# EAGLE board TOOLKIT_CON_ETIQ (EAGLE 7.6.0)
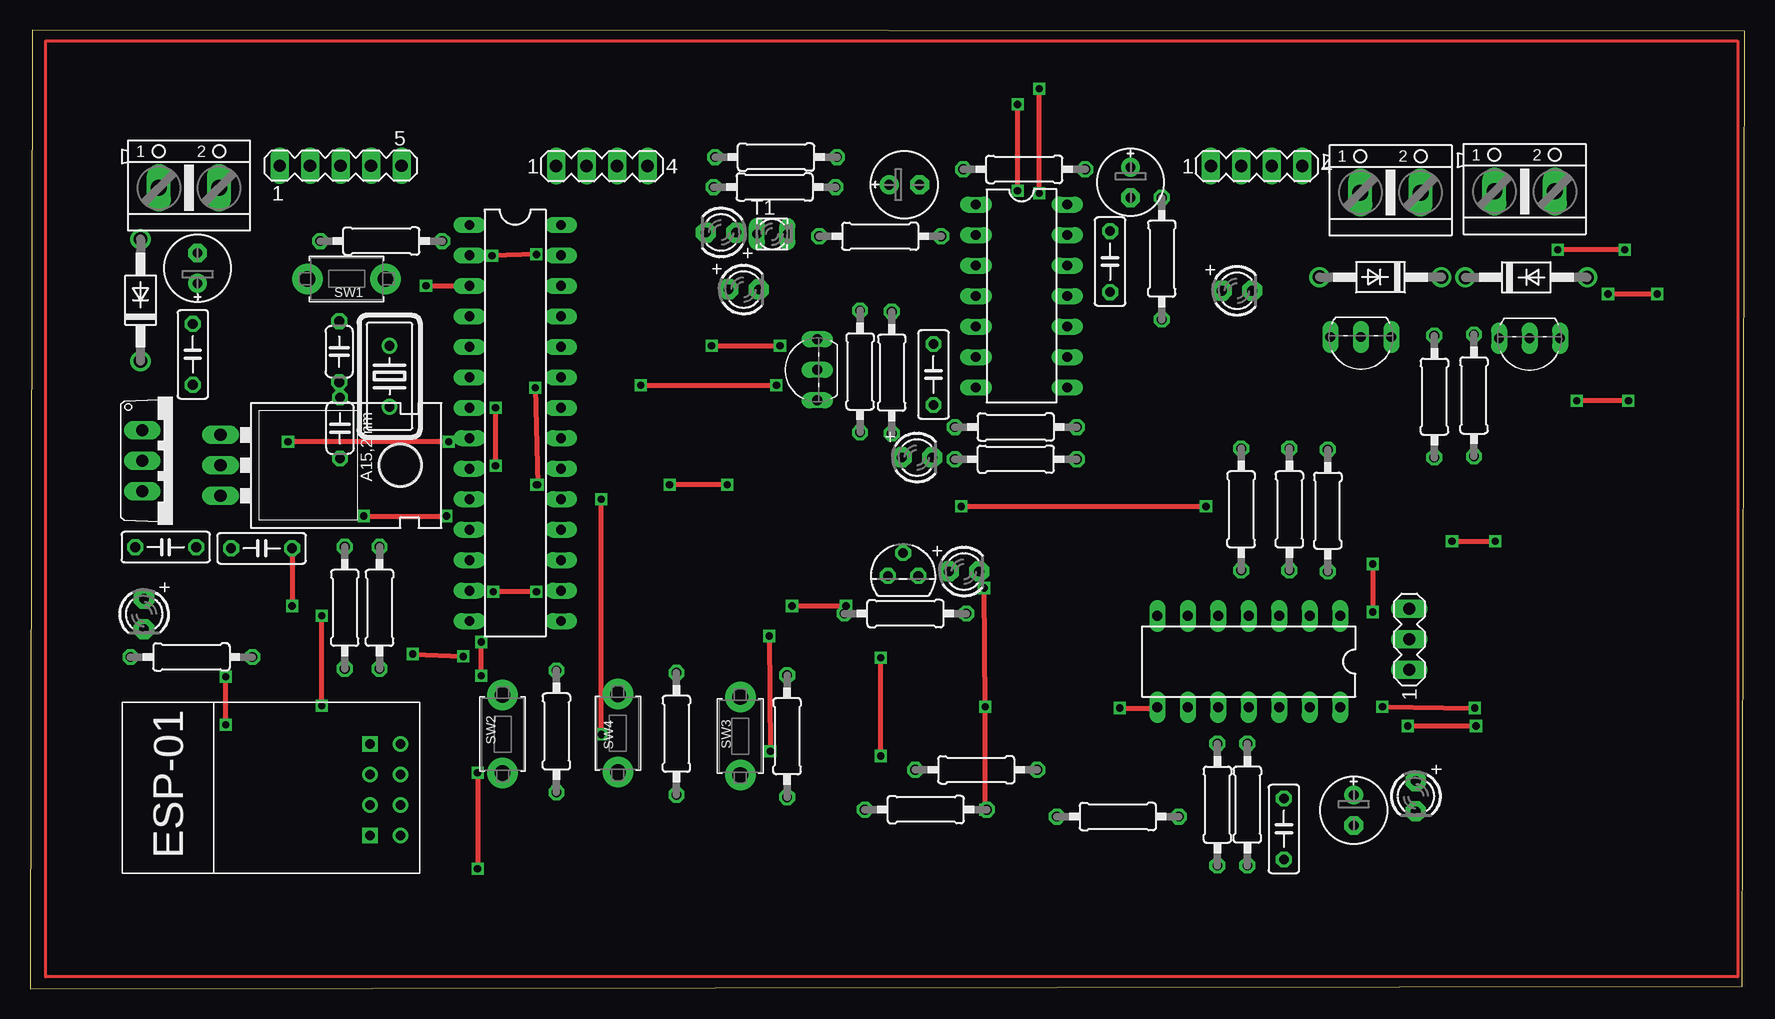
[diagram p0: board, top side]
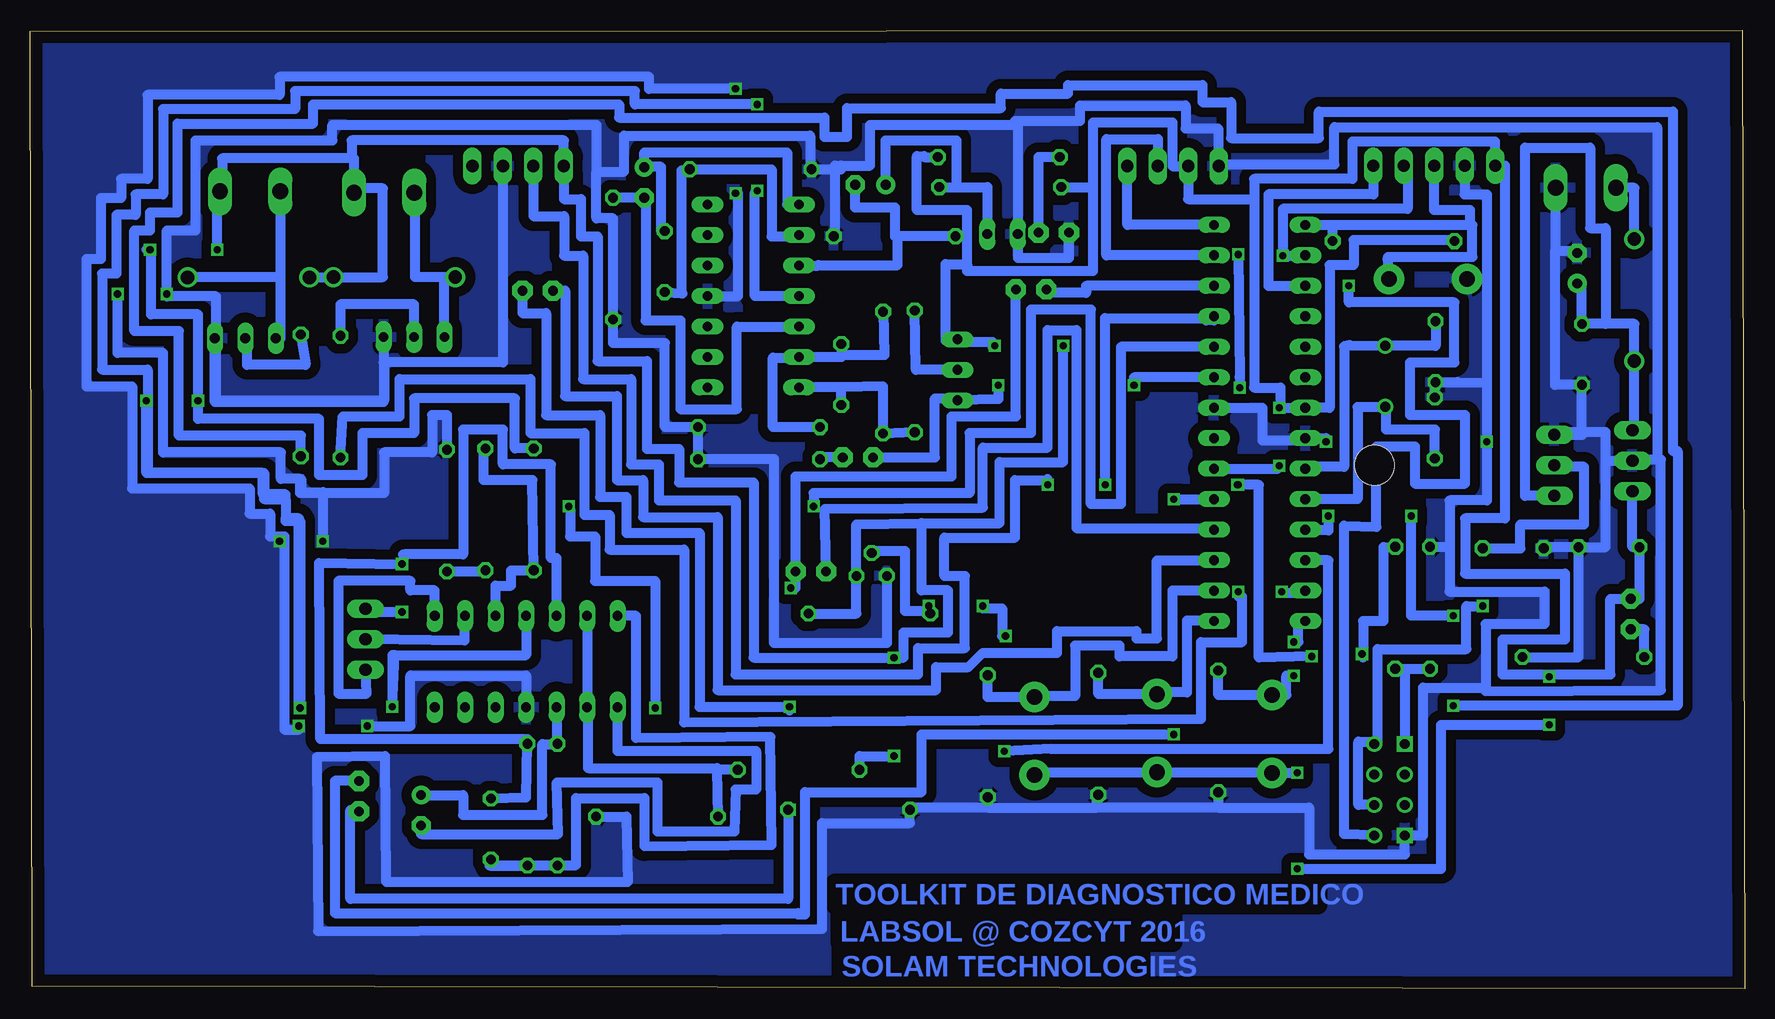
[diagram p1: board, bottom side, seen from below]

Size 142.9 x 79.9 mm. Coordinates in mm from the lower left corner, seen from the top.
Outline: 0,0 142.7,0.2 142.9,79.8 0.2,79.9 0,0
Copper layers (1*16): Top 0.035mm / dielectric 1.5mm / Bottom 0.035mm
Design rules "default": minimum track width 10mil, minimum drill 24mil, track to track 8mil, track to pad 8mil, pad to pad 8mil, via to via 8mil, smd to smd 8mil, copper to edge 40mil, drill to drill 8mil, minimum pad ring 10mil, minimum via ring 8mil, stop-mask expansion 4mil, vias tented up to drill 0mil, thermal gap 10mil

## Footprints (pad centres in the part's own frame; a part is rotated, then mirrored left to right if it is on the bottom)
C050-024X044 = drill 0.813 octagon: 1 -2.54,0; 2 2.54,0
E2,5-6E = drill 0.813 pad 1.575: + -1.27,0 | drill 0.813 pad 1.575 octagon: - 1.27,0
C050-025X075 = drill 0.813 octagon: 1 -2.54,0; 2 2.54,0
DO41-10 = drill 1.118: A 5.08,0; C -5.08,0
DIL28-3 = drill 0.813 long: 1 -16.51,-3.81; 2 -13.97,-3.81; 3 -11.43,-3.81; 4 -8.89,-3.81; 5 -6.35,-3.81; 6 -3.81,-3.81; 7 -1.27,-3.81; 8 1.27,-3.81; 9 3.81,-3.81; 10 6.35,-3.81; 11 8.89,-3.81; 12 11.43,-3.81; 13 13.97,-3.81; 14 16.51,-3.81; 15 16.51,3.81; 16 13.97,3.81; 17 11.43,3.81; 18 8.89,3.81; 19 6.35,3.81; 20 3.81,3.81; 21 1.27,3.81; 22 -1.27,3.81; 23 -3.81,3.81; 24 -6.35,3.81; 25 -8.89,3.81; 26 -11.43,3.81; 27 -13.97,3.81; 28 -16.51,3.81
DIL14 = drill 0.813 long: 1 -7.62,-3.81; 2 -5.08,-3.81; 3 -2.54,-3.81; 4 0,-3.81; 5 2.54,-3.81; 6 5.08,-3.81; 7 7.62,-3.81; 8 7.62,3.81; 9 5.08,3.81; 10 2.54,3.81; 11 0,3.81; 12 -2.54,3.81; 13 -5.08,3.81; 14 -7.62,3.81
TO220V = drill 1.016 long: 1 -2.54,-2.54; 2 0,-2.54; 3 2.54,-2.54
TO-92 = drill 0.813 pad 1.27 octagon: 1 -1.27,0; 2 0,1.905; 3 1.27,0
LED3MM = drill 0.813 pad 1.676 octagon: A -1.27,0; K 1.27,0
TO92-EBC = drill 0.813 long: B 0,-1.27; C 2.54,-1.27; E -2.54,-1.27
0207/10 = drill 0.813 octagon: 1 -5.08,0; 2 5.08,0
MA05-1 = drill 1.016 long: 1 -5.08,0; 2 -2.54,0; 3 0,0; 4 2.54,0; 5 5.08,0
MA03-1 = drill 1.016 long: 1 -2.54,0; 2 0,0; 3 2.54,0
MA04-1 = drill 1.016 long: 1 -3.81,0; 2 -1.27,0; 3 1.27,0; 4 3.81,0
TACT_PANA-EVQ = drill 1.3 pad 2.54: P$1 -3.25,0; P$2 3.25,0
BPX81 = drill 0.813 long: C 1.27,0; E -1.27,0
LD1117V33 = drill 1.016 long: GND -2.54,-8.89; IN 2.54,-8.89; OUT 0,-8.89 | hole 3.302: 0,6.096
ESP01 = drill 0.8: CH_PD -1.285,-8.178; GPIO0 1.255,-5.638; GPIO2 -1.285,-5.638; RST 1.255,-8.178; TX -3.825,-8.178; VCC 3.795,-8.178 | drill 0.8 square: GND -3.825,-5.638; RX 3.795,-5.638
HC18U-V = drill 0.813: 1 -2.54,0; 2 2.54,0
AK500/2 = drill 1.321 long: 1 -2.515,0; 2 2.515,0

## Placement (x,y rotation side)
C1  22 pF  [C050-024X044]  25.77,53.09 90 top
C2  22 pF  [C050-024X044]  25.83,46.73 270 top
C3  1 uF  [E2,5-6E]  72.86,67.01 0 top
C4  100 nF  [C050-025X075]  90.01,60.6 90 top
C5  1 uF  [E2,5-6E]  91.71,67.2 270 top
C6  100 nF  [C050-025X075]  75.29,51.19 270 top
C7  470 uF  [E2,5-6E]  13.96,60.05 90 top
C8  100 nF  [C050-025X075]  13.57,52.87 90 top
C9  100 nF  [C050-025X075]  11.31,36.8 180 top
C10  100 nF  [C050-025X075]  19.3,36.71 0 top
C11  10 nF  [C050-025X075]  104.49,13.32 90 top
C12  100 uF  [E2,5-6E]  110.31,14.88 270 top
D1  1N4004  [DO41-10]  112.54,59.31 180 top
D2  1N4004  [DO41-10]  124.69,59.29 0 top
D3  1N4004  [DO41-10]  9.21,57.39 90 top
IC1  ATMEGA328-20P  [DIL28-3]  40.43,47.15 270 top
IC2  1/4 LM324  [DIL14]  82.63,57.73 270 top
IC4  LM7805  [TO220V]  11.9,44 270 top
IC5  DS1820  [TO-92]  72.76,34.41 0 top
IC6  1/4 LMC6484  [DIL14]  101.56,27.27 180 top
LED1  IR  [LED3MM]  57.59,63.02 180 top
LED2  RED  [LED3MM]  9.5,31.23 270 top
LED3  GREEN  [LED3MM]  73.91,44.28 0 top
LED4  BLUE  [LED3MM]  115.48,16.05 270 top
LED5  BLUE  [LED3MM]  100.59,58.18 0 top
LED6  BLUE  [LED3MM]  77.83,34.78 0 top
LED7  BLUE  [LED3MM]  59.47,58.28 0 top
Q1  2N2222A  [TO92-EBC]  110.9,53.04 180 top
Q2  2N2222A  [TO92-EBC]  124.96,52.94 180 top
Q3  2N2222A  [TO92-EBC]  64.34,51.58 90 top
R1  10 k  [0207/10]  29.27,62.31 0 top
R2  220 r  [0207/10]  62.17,69.31 0 top
R3  39 k  [0207/10]  62.05,66.81 180 top
R4  68 k  [0207/10]  70.85,62.71 180 top
R5  8.2 k  [0207/10]  82.85,68.29 0 top
R6  68 k  [0207/10]  94.31,60.85 90 top
R7  10k  [0207/10]  82.15,46.81 180 top
R8  470k  [0207/10]  71.81,51.35 90 top
R9  1.5 k  [0207/10]  69.17,51.45 270 top
R10  220 r  [0207/10]  13.45,27.65 180 top
R11  2.2 k  [0207/10]  29.13,31.75 90 top
R12  4.7 k  [0207/10]  26.23,31.75 90 top
R13  4.7 k  [0207/10]  72.95,31.27 0 top
R14  6.8 k  [0207/10]  100.93,39.95 90 top
R15  4.7 k  [0207/10]  104.95,39.95 90 top
R16  220 r  [0207/10]  108.15,39.85 270 top
R17  100 k  [0207/10]  101.45,15.35 90 top
R18  10 k  [0207/10]  78.85,18.25 180 top
R19  10 k  [0207/10]  90.65,14.35 180 top
R20  100 k  [0207/10]  98.95,15.35 270 top
R21  220 r  [0207/10]  82.15,44.13 0 top
R22  220 r  [0207/10]  74.65,14.93 0 top
R23  220 r  [0207/10]  117.03,49.35 270 top
R24  220 r  [0207/10]  120.33,49.45 270 top
R25  10 k  [0207/10]  43.87,21.45 90 top
R26  10 k  [0207/10]  53.87,21.25 90 top
R27  10 k  [0207/10]  63.09,21.05 90 top
SV1  [MA05-1]  25.88,68.59 0 top
SV2  [MA03-1]  114.94,29.12 90 top
SV3  [MA04-1]  47.65,68.56 0 top
SW1  [TACT_PANA-EVQ]  26.39,59.16 0 top
SW2  [TACT_PANA-EVQ]  39.39,21.22 90 top
SW3  [TACT_PANA-EVQ]  59.19,21.06 90 top
SW4  [TACT_PANA-EVQ]  48.99,21.3 90 top
T1  BPX81  [BPX81]  61.85,62.89 0 top
TRANSDUCTOR  ASDX015PDAA5  [MA04-1]  102.22,68.56 0 top
U$1  LD33V  [LD1117V33]  24.76,43.62 270 top
U$2  ESP8266_01  [ESP01]  22.7,16.61 90 top
X1  16 MHz  [HC18U-V]  29.96,51.04 270 top
X2  12 Vcc  [AK500/2]  13.25,66.75 0 top
X3  MOTOR  [AK500/2]  113.38,66.35 0 top
X4  VALVE  [AK500/2]  124.55,66.45 0 top

## Library data of the parts
C1-C12 R1-R27 = rcl
D1-D3 = diode
IC1 = atmega328
IC2 IC4 IC6 = linear
IC5 = DS1820
LED1-LED7 SW1-SW4 = adafruit
Q1-Q3 = transistor-neu-to92
SV1-SV3 TRANSDUCTOR = con-lstb; OC_FARNELL: unknown; OC_NEWARK: unknown
T1 = opto-trans-siemens; OC_FARNELL: unknown; OC_NEWARK: unknown
U$1 = LD1117V33
U$2 = esp8266modules
X1 = crystal; OC_FARNELL: unknown; OC_NEWARK: unknown
X2-X4 = con-ptr500; OC_FARNELL: unknown; OC_NEWARK: unknown

## Nets
+3V3: C10.2 U$1.OUT U$2.CH_PD U$2.VCC
+5V: C9.2 D1.C D2.C IC1.7 IC1.20 IC2.4 IC4.3 IC5.3 IC6.4 LED2.A Q3.C R1.1 R2.2 R3.2 R13.2 R14.2 R18.2 SV1.1 SV3.2 TRANSDUCTOR.1 X3.2 X4.2
+12V: IC6.6 IC6.9 R18.1 R19.2
+15V: IC6.3 R14.1 R15.2
COUNTER_E: IC6.1 SV2.1
GLUCO: C12.- IC1.24 IC6.8
GND: C1.1 C2.1 C7.- C8.1 C9.1 C10.1 IC1.8 IC1.22 IC2.11 IC4.2 IC5.1 IC6.11 LED1.K Q1.E Q2.E R4.1 R5.1 R6.1 R7.1 R10.1 R12.2 R16.1 R19.1 R21.2 R22.1 R25.1 R26.1 R27.1 SV1.2 SV3.1 SW1.P$1 T1.E TRANSDUCTOR.3 U$1.GND U$2.GND X2.2
I_GLUCO: IC1.19 LED4.A
I_PRES: IC1.17 LED5.A
I_PULSE: IC1.26 LED7.A
I_TEMP: IC1.18 LED6.A
MOTOR: IC1.13 R23.2
N$1: C1.2 IC1.9 X1.1
N$2: C2.2 IC1.10 X1.2
N$3: R11.1 R12.1 U$2.RX
N$4: LED1.A R2.1
N$5: C3.+ R3.1 T1.C
N$6: C3.- IC2.3 R4.2
N$7: C4.1 IC2.2 R5.2
N$8: C6.1 IC2.6 R7.2 R8.2
N$9: C6.2 IC2.7 R8.1 R9.2
N$10: C4.2 C5.+ IC2.1
N$11: C5.- IC2.5 R6.2
N$12: Q3.B R9.1
N$13: R15.1 R16.2
N$14: LED3.K R21.1
N$16: C7.+ C8.2 D3.C IC4.1 U$1.IN
N$17: LED2.K R10.2
N$18: LED4.K LED5.K LED6.K LED7.K R22.2
N$19: C11.1 IC6.7 R17.1 R20.2
N$20: Q1.B R23.1
N$21: C12.+ IC6.10 R20.1
N$22: D2.A Q2.C X4.1
N$23: D1.A Q1.C X3.1
N$24: Q2.B R24.1
N$26: D3.A X2.1
N$30: SW2.P$1 SW3.P$1 SW4.P$1
PULSE: IC1.23 LED3.A Q3.E
READY: IC1.15 R26.2 SW4.P$2
REFERENCE_E: IC6.2 SV2.2
RESU: IC1.16 R27.2 SW3.P$2
RST: IC1.1 R1.2 SV1.3 SW1.P$2
RX: IC1.2 R11.2 SV1.4
SCL: IC1.28 SV3.4
SDA: IC1.27 SV3.3
START: IC1.14 R25.2 SW2.P$2
TEMP: IC1.12 IC5.2 R13.1
TRANS: IC1.25 TRANSDUCTOR.2
TX: IC1.3 SV1.5 U$2.TX
VALVE: IC1.11 R24.2
WORKING_E: C11.2 IC6.5 R17.2 SV2.3

## Tracks (layer width: path | path; a pad name or v marks a point on that pad's centre or on a via)
+3V3  (via drill 0.6)
  Top 0.406: C10.2 v21.84,31.9
  Bottom 0.813: C10.2 18.7,36.71 18.7,38.7 13.4,38.7 13.4,43.5 15.87,43.5 U$1.OUT | U$2.CH_PD 32.2,15.33 32.2,20.6 30.88,20.6 U$2.VCC 30.6,20.41 30.6,28.3 23.2,28.3 23.2,31.9 v21.84,31.9
+5V  (via drill 0.6)
  Top 0.406: v38.8,43.6 v38.8,48.42 | v56.8,53.6 v62.5,53.6 | v132.9,61.6 v127.3,61.6 | v70.9,19.4 v70.9,27.6 | v82.3,66.5 v82.3,73.7 | v133.2,49 v128.9,49 | v112.7,23.5 v120.4,23.4
  Bottom 0.813: IC4.3 9.36,36.8 C9.2 8.77,32.5 LED2.A 11.2,32.5 11.2,26.2 20.2,26.2 20.2,29.1 15,29.1 15,34.6 23.3,34.6 23.3,39.2 20,39.2 20,68.59 SV1.1 20.8,70.6 32.7,70.6 32.7,67.5 40.9,67.5 40.9,65.8 | 40.9,65.8 40.9,50.1 38.7,50.1 38.7,48.42 | 38.7,48.42 IC1.7 34.6,48.42 34.6,60.3 32.6,60.3 32.6,62.4 24.19,62.4 R1.1 | IC1.20 38.9,43.34 38.9,43.6 v38.8,43.6 | 38.7,48.42 v38.8,48.42 | 40.9,65.8 46.38,65.8 SV3.2 47.7,68.56 47.7,72.2 54.3,72.2 54.3,66.81 | R2.2 68.4,69.31 68.4,69.4 69,69.4 69,64.9 64.8,64.9 64.8,60.4 | R3.2 54.3,66.81 | 54.3,66.81 54.3,59.8 64.8,59.8 64.8,60.4 | 64.8,60.4 66.6,60.4 66.6,54.02 Q3.C 64.61,53.9 62.7,53.9 62.7,53.5 62.5,53.5 v62.5,53.6 | R13.2 74.03,31.27 IC5.3 74.03,38.7 68.6,38.8 | 68.6,38.8 62.1,38.8 62.1,43.9 56.8,43.9 v56.8,53.6 | 116.1,69.2 115.89,69.2 X3.2 115.89,66.7 113.5,66.7 113.5,59.31 D1.C 119.61,59.31 D2.C | 116.1,69.2 126.9,69.2 126.9,66.45 X4.2 126.7,66.45 126.7,66 127.3,66 v127.3,61.6 | 68.6,38.8 68.6,33.2 66.4,33.2 66.4,29.7 70.1,29.7 70.1,27.6 v70.9,27.6 82.6,27.6 82.6,42.2 88.8,42.2 88.8,45 91.5,45 91.5,52.3 95.6,52.3 95.6,62.7 97,62.7 97,65.8 98.41,65.8 TRANSDUCTOR.1 98.41,70.7 116.1,70.7 116.1,69.2 | R14.2 102.5,45.03 102.5,49.2 110.9,49.2 110.9,46.3 115.2,46.3 115.2,42.8 118.8,42.8 118.8,47.5 128.9,47.5 v128.9,49 128.9,56.2 132.8,56.2 132.8,61.5 132.9,61.5 v132.9,61.6 133.2,61.6 | R18.2 73.77,19.4 v70.9,19.4 | IC2.4 82.5,57.73 82.5,66.4 82.4,66.4 82.4,66.5 v82.3,66.5 | v82.3,73.7 92.5,73.7 92.5,74.8 120.8,74.8 120.8,73.3 131.8,73.3 131.8,66.2 134.1,66.2 134.1,64.5 135.7,64.5 135.7,59.6 136.9,59.6 136.9,51.6 133.1,51.6 133.1,43 123.4,43 123.4,40.8 121.6,40.8
  Bottom 0.813: 121.6,40.8 121.6,39.2 | 121.6,39.2 121.6,39 120.4,39 v120.4,23.4 | 112.5,27.8 v112.7,23.5 112.7,27.8 112.5,27.8 | 112.5,27.8 101.56,27.8 IC6.4 | 120.5,23.5 120.5,39.2 121.6,39.2 | 121.6,40.8 121.6,41.2 123.5,41.2 123.5,43 133.2,43 v133.2,49
+12V
  Bottom 0.813: IC6.6 IC6.9 96.4,23.46 96.4,18.4 85.67,18.4 85.67,18.25 | 85.67,18.25 R19.2 | R18.1 85.67,18.25
+15V
  Bottom 0.813: R15.2 105.1,45.03 105.1,42.4 101.03,42.4 R14.1 102.8,34.87 102.8,33.6 104.1,33.6 IC6.3
COUNTER_E
  Bottom 0.813: SV2.1 114.84,24.6 117.2,24.6 117.2,34 111.2,34 111.2,33.2 109.18,33.2 IC6.1
GLUCO  (via drill 0.6)
  Top 0.406: v77.6,40.2 v98,40.2 | v90.8,23.4 v93.94,23.4
  Bottom 0.813: IC1.24 52,53.5 52,40.4 54.5,40.4 54.5,56.6 59.5,56.6 59.5,46.3 64.6,46.3 64.6,41.3 77.6,41.3 v77.6,40.2 | v98,40.2 98,40 97.9,40 97.9,37.7 95.8,37.7 95.8,34 90.8,34 v90.8,23.4 | IC6.8 v93.94,23.4 93.94,19.8 82.4,19.8 82.4,16.6 84.1,16.6 84.2,13.1 90.6,13.1 90.6,17.2 99,17.2 98.9,12.9 110.31,12.9 C12.-
GND  (via drill 0.6)
  Top 0.406: v135.6,57.9 v131.5,57.9 | v34.9,45.6 v21.5,45.6 | v84.1,66.3 v84.1,75 | v120.5,21.9 v114.8,21.9 | v118.5,37.3 v122.1,37.3
  Bottom 0.813: 15.77,61.5 13.96,61.5 C7.- | 15.77,61.5 15.8,61.5 15.8,50.33 C8.1 13.57,46.16 U$1.GND 15.87,46.4 11.6,46.4 11.6,44 | 15.77,61.5 X2.2 | C9.1 16.76,36.8 C10.1 | C9.1 11.6,36.8 11.6,44 | 11.6,44 IC4.2 8.7,44 8.7,44.1 7.3,44.1 | R10.1 13.85,27.65 C9.1 | SV1.2 23.34,66.2 21.5,66.2 21.5,59.16 | 21.5,59.16 21.5,50.5 | 21.5,50.5 v21.5,45.6 21.5,40.7 24.6,40.7 24.6,36.83 | 24.6,36.83 24.6,33.1 16.7,33.1 16.7,30.4 21.6,30.4 21.6,25.1 | 21.6,25.1 21.6,24.8 7,24.9 7,44.1 7.3,44.1 | IC1.22 40.2,48.42 40.2,45.7 36.62,45.7 IC1.8 34.9,45.88 v34.9,45.6 | C2.1 25.83,50.25 C1.1 23.94,50.55 21.5,50.5 | SW1.P$1 21.5,59.16 | R12.2 24.6,36.83 | 21.6,25.1 26.8,25.1 26.8,12.78 U$2.GND 28.34,11.2 36.3,11.2 36.3,15.1 43.87,15.1 | 7.3,44.1 7.3,71.8 34.2,71.8 34.2,68.7 43.84,68.7 SV3.1 44.1,68.56 44.1,69.5 43.9,69.5 43.9,71.7 46.6,71.7 46.6,73.6 55.4,73.6 55.4,72.3 60.58,72.3 | R25.1 43.87,15.1 | 43.87,15.1 54,15.1 | 54,15.1 54,16.17 R26.1 | R27.1 63.09,15.1 | 63.09,15.1 54,15.1 | 56.32,61 LED1.K 56.32,60.9 60.58,60.9 T1.E 60.58,72 | 60.8,72.3 60.58,72.3 | 60.58,72.3 60.58,72 | R4.1 75.8,62.71 75.8,68.6 75.3,68.6 | 75.3,68.6 72.9,68.6 72.9,72 60.58,72 | 75.3,68.6 75.3,68.29 R5.1 77.9,68.29 77.9,71.1 93.4,71.1 93.4,68.1 95.7,68.1 | 95.7,68.1 95.7,64.2 94.31,64.2 R6.1 94.31,53.8 90,53.8 90,46.81 R7.1 R21.2 80.9,44.13 80.9,28.8 71.49,28.8 IC5.1 | Q1.E 113.44,52.2 | 113.44,52.2 113.44,48.9 127.5,48.9 Q2.E | 113.4,52.2 113.44,52.2 | TRANSDUCTOR.3 103.49,52.2 113.4,52.2 | 113.4,52.2 113.4,49 127.4,49 127.4,57.7 131.5,57.7 v131.5,57.9 131.5,63.2 129.1,63.2 129.1,70.7 117.7,70.7 117.7,72 95.7,72 95.7,68.1 | R16.1 108.15,47.8 109.4,47.8 109.4,44.7 113.4,44.7 113.4,41.3 120.4,41.3 120.4,42.5
  Bottom 0.813: 120.4,42.5 122,42.5 122,44.7 131.8,44.7 131.8,53 135.6,53 v135.6,57.9 | R19.1 93.2,14.35 93.1,8.9 113.2,8.9 113.3,19.4 119,19.3 118.9,4.8 76.9,5 76.9,13.8 69.57,13.8 R22.1 69.57,15.1 63.09,15.1 | IC2.11 83.9,57.73 83.9,66.3 v84.1,66.3 | v84.1,75 91.3,75 91.3,76 122.1,76 122.1,74.5 133.1,74.5 133.1,67.5 135.3,67.5 135.3,65.9 137,65.9 137,60.8 138.2,60.8 138.2,50.2 134.4,50.2 134.4,41.7 124.6,41.7 124.6,39.6 122.9,39.6 122.9,37.7 122.1,37.7 | 122.1,37.7 121.7,37.7 121.7,21.6 120.5,21.6 v120.5,21.9 | v114.8,21.9 111.2,21.9 111.2,26.1 101.56,26.1 IC6.11 | 120.4,42.5 120.3,42.5 120.3,41.4 118.5,41.4 v118.5,37.3 | v122.1,37.3 122.1,37.7
  pour Bottom (isolate 0.813): -2.7,81 147.3,81 147.3,-4 -2.7,-4
I_GLUCO  (via drill 0.6)
  Top 0.406: v47.6,21.2 v47.6,40.8
  Bottom 0.813: LED4.A 117.5,17.32 117.5,6.3 78.9,6.3 78.9,6.2 78.3,6.2 78.3,16.4 68.6,16.4 68.6,21.2 v47.6,21.2 | v47.6,40.8 IC1.19
I_PRES
  Bottom 0.813: LED5.A 98.3,58.18 98.3,49.4 94,49.4 94,42.4 91.8,42.4 91.8,39.3 85.6,39.3 85.6,24.9 67.4,24.9 67.4,26.8 64.7,26.8 63.5,28 57.3,28 57.3,29.8 50.7,29.8 50.7,29.2 49,29.2 49,35.7 44.24,35.7 IC1.17
I_PULSE
  Bottom 0.813: IC1.26 54.9,58.58 54.9,58 58.2,58 LED7.A
I_TEMP
  Bottom 0.813: LED6.A 76.66,40 63.5,40.1 63.5,45.1 58.1,45.1 58.1,54.9 55.7,54.9 55.7,38.4 44.24,38.4 IC1.18
MOTOR  (via drill 0.6)
  Top 0.406: v42.2,33.1 v38.6,33.1
  Bottom 0.813: R23.2 116.83,47.7 112.1,47.7 112.1,50.8 101.2,50.8 101.2,46.3 96.7,46.3 96.7,39.5 94.6,39.5 94.6,36.6 88.4,36.6 88.4,22.2 45.3,22.5 45.3,28.9 41.9,28.9 41.9,32.7 42.2,32.7 v42.2,33.1 | v38.6,33.1 38.6,33 36.62,33 IC1.13
N$1
  Bottom 0.813: IC1.9 36.62,43.5 33.4,43.5 33.4,53.54 32.96,53.64 X1.1 25.77,53.58 C1.2
N$2
  Bottom 0.813: IC1.10 32.26,40.8 32.26,48.5 X1.2 29.9,48.5 29.9,46.6 25.83,46.6 C2.2
N$3
  Bottom 0.813: R12.1 R11.1 28.34,26.67 U$2.RX
N$4
  Bottom 0.813: R2.1 58.86,69.31 LED1.A
N$5
  Bottom 0.813: R3.1 65.7,66.81 | 65.7,66.81 63.12,66.81 T1.C | C3.+ 71.6,70.7 65.7,70.7 65.7,66.81
N$6
  Bottom 0.813: R4.2 70.6,62.71 | 70.6,62.71 70.8,62.71 70.8,65.1 74.13,65.1 C3.- | IC2.3 77.2,60.27 77.2,60.3 70.6,60.3 70.6,62.71
N$7
  Bottom 0.813: IC2.2 78.82,62.7 81.1,62.7 81.1,68.29 R5.2 87.93,68.2 88.6,68.2 88.6,57.96 88.53,57.96 C4.1
N$8
  Bottom 0.813: C6.1 75.29,52.8 | 75.29,52.8 75.29,52.65 IC2.6 78.82,52.6 81,52.6 81,46.81 R7.2 | R8.2 71.71,52.8 75.29,52.8
N$9
  Bottom 0.813: C6.2 75.29,50.11 | 75.29,50.11 IC2.7 | 75.29,50.11 71.81,50.21 R8.1 R9.2
N$10
  Bottom 0.813: IC2.1 79.8,65.35 79.8,69.7 91.71,69.7 C5.+ 91.71,68.5 90.3,68.5 90.3,63.14 C4.2
N$11
  Bottom 0.813: R6.2 C5.- 91.6,65.93 91.6,55.7 88.7,55.7 88.7,48.3 84,48.3 84,55.19 IC2.5
N$12
  Bottom 0.813: Q3.B 69.07,51.58 R9.1
N$13
  Bottom 0.813: R15.1 104.95,34.77 R16.2
N$14
  Bottom 0.813: LED3.K 77.07,44.28 R21.1
N$15
  Top 0.254: 1.3,79 142.3,79 142.3,1 1.3,1 1.3,79
N$16
  Bottom 0.813: 11.6,55.41 9.21,55.41 D3.C 9.21,46.54 IC4.1 | 11.6,55.41 C8.2 13.57,58.78 C7.+ | U$1.IN 18.3,41.08 18.3,70.1 12.9,70.1 12.9,63.4 11.6,63.4 11.6,55.41
N$17
  Bottom 0.813: R10.2 8.37,29.96 LED2.K
N$18  (via drill 0.6)
  Top 0.406: v79.5,33.4 v79.6,23.5 v79.6,14.93
  Bottom 0.813: LED7.K 60.74,47.7 66.1,47.7 66.1,42.7 79.1,42.7 LED6.K 79.1,33.4 v79.5,33.4 | LED5.K 101.86,56.3 99.9,56.3 99.9,47.8 95.4,47.8 95.4,41 93.2,41 93.2,38 87.1,38 87.1,23.5 79.7,23.5 79.6,23.2 v79.6,23.5 | LED4.K 116.2,14.88 116.2,7.5 79.73,7.5 R22.2 v79.6,14.93
N$19
  Bottom 0.813: R20.2 R17.1 104.59,10.27 C11.1 104.59,10.3 97.4,10.3 97.4,15.9 91.7,15.9 91.7,11.9 81.1,12 81.2,21 92.4,20.9 92.4,31.08 IC6.7
N$20
  Bottom 0.813: Q1.B 110.9,57.03 117.03,57.03 R23.1
N$21
  Bottom 0.813: IC6.10 98.95,23.46 R20.1 98.95,20.4 100.2,20.4 100.2,14.5 106.8,14.5 106.8,16.15 C12.+
N$22
  Bottom 0.813: X4.1 122.03,59.29 | 122.03,59.29 D2.A | 122.03,59.29 122.03,54.21 Q2.C
N$23
  Bottom 0.813: X3.1 110.86,65.7 110.8,65.7 110.8,59.31 D1.A 108.36,59.31 Q1.C
N$24
  Bottom 0.813: R24.1 119.93,52 124.8,52 124.8,54.21 Q2.B
N$26
  Bottom 0.813: D3.A 9.21,66.75 X2.1
N$30
  Bottom 0.813: SW4.P$1 48.99,18 | 48.99,18 59.1,18 SW3.P$1 | SW2.P$1 39.59,18 48.99,18
PULSE  (via drill 0.6)
  Top 0.406: v50.9,50.3 v62.2,50.3
  Bottom 0.813: LED3.A 67.5,44.28 67.5,49.2 64.71,49.2 Q3.E 62.2,49.14 v62.2,50.3 | IC1.23 50.9,50.96 v50.9,50.3
READY
  Bottom 0.813: R26.2 53.87,24.55 SW4.P$2 48.99,24.7 46.5,24.7 46.5,30.7 44.24,30.7 IC1.15
REFERENCE_E
  Bottom 0.813: IC6.2 106.7,31.08 106.7,29.02 SV2.2
RESU
  Bottom 0.813: R27.2 63.09,24.31 SW3.P$2 59.19,24.7 58.8,24.7 58.8,24.4 55.8,24.4 55.8,28.6 52.1,28.6 52.1,27.7 47.7,27.7 47.7,33.18 IC1.16
RST
  Bottom 0.813: IC1.1 34.35,63.66 | 34.35,63.66 22.9,63.66 | 22.9,63.66 22.9,64.9 25.88,64.9 SV1.3 | R1.2 34.35,63.66 | SW1.P$2 29.74,61 22.7,61 22.7,63.66 22.9,63.66
RX  (via drill 0.6)
  Top 0.406: v31.9,27.9 v36.1,27.7 | v42.2,61.2 v38.5,61.1 | v42.1,50.1 v42.3,42
  Bottom 0.813: SV1.4 28.1,68.59 28.1,65 38.5,65 v38.5,61.1 36.62,61.1 IC1.2 | v36.1,27.7 40.5,27.6 40.5,42 v42.2,42 v42.3,42 | 31.8,27.9 31.8,30.63 30.1,30.63 30.1,36.8 28.93,36.8 R11.2 | 31.8,27.9 31.8,27.6 | v31.9,27.9 31.8,27.9 | v42.2,61.2 42.1,51 v42.1,50.1
S$1  (via drill 0.6)
  Top 0.406: v37.3,18 v37.3,10 | v16.3,22 v16.3,26
  Bottom 0.813: 39.3,18 v37.3,18 | v37.3,10 25.3,10 25.3,22 v16.3,22
SCL
  Bottom 0.813: IC1.28 51.46,63.66 SV3.4
SDA
  Bottom 0.813: IC1.27 53.2,61.12 53.2,70.8 48.92,70.8 SV3.3
START  (via drill 0.6)
  Top 0.406: v37.6,26.1 v37.6,28.9
  Bottom 0.813: R25.2 43.87,24.47 SW2.P$2 38.2,24.47 38.2,26.1 v37.6,26.1 | v37.6,28.9 37.2,28.9 37.2,30.6 36.62,30.6 IC1.14
TEMP  (via drill 0.6)
  Top 0.406: v68,31.9 v63.5,31.9 | v61.6,29.4 v61.7,19.8
  Bottom 0.813: IC5.2 72.76,36.5 70,36.5 70,31.5 68,31.5 | R13.1 67.87,31.5 68,31.5 | 68,31.5 v68,31.9 | v63.5,31.9 63.5,31.7 61.9,31.7 61.9,29.4 v61.6,29.4 | IC1.12 36.62,35.7 34.7,35.7 34.7,20 57.8,20 v61.7,19.8
TRANS  (via drill 0.6)
  Top 0.406: v58.1,42 v53.3,42
  Bottom 0.813: IC1.25 44.24,55.7 44.9,55.7 44.9,55.9 53.3,55.9 v53.3,42 | TRANSDUCTOR.2 100.95,64.4 98.4,64.4 98.4,61.1 96.8,61.1 96.8,50.8 92.8,50.8 92.8,43.7 90.5,43.7 90.5,40.7 84.1,40.7 84.1,26.2 68.9,26.2 68.9,28.4 65,28.4 65,34.4 66.7,34.4 66.7,37.6 60.8,37.6 60.8,42.4 58.1,42.4 | 58.1,42.4 58.1,42.5 | 58.1,42.4 v58.1,42
TX  (via drill 0.6)
  Top 0.406: v33,58.58 IC1.3
  Bottom 0.813: SV1.5 30.96,66.2 39.7,66.2 39.7,58.58 IC1.3 | U$2.TX 33.4,12.88 33.4,38.6 30.7,38.5 30.7,45.2 27.5,45.2 27.5,42.1 23.3,42.1 23.3,47.8 27.9,47.8 27.9,52.2 24.2,52.2 24.2,57.2 33,57.2 v33,58.58
VALVE  (via drill 0.6)
  Top 0.406: v24.3,23.6 v24.3,31.1 | v27.8,39.4 v34.7,39.4
  Bottom 0.813: R24.2 120.33,46.1 130.5,46.1 130.5,54.8 134.2,54.8 134.2,63.2 132.9,63.2 132.9,64.7 130.6,64.7 130.6,72.1 119.3,72.1 119.3,73.7 93.8,73.7 93.8,72.6 76.7,72.6 76.7,71 74.8,71 74.8,73.4 62,73.4 62,74.6 56.4,74.6 56.4,75.3 45.2,75.3 45.2,73.9 42.8,73.9 42.8,70.9 35.5,70.9 35.5,73.1 6,73.1 6,44.8 5.6,44.8 5.6,23.6 v24.3,23.6 | v24.3,31.1 27.8,31.1 v27.8,39.4 | v34.7,39.4 34.7,38.2 36.62,38.2 IC1.11
WORKING_E  (via drill 0.6)
  Top 0.406: v111.9,35.4 v111.9,31.4
  Bottom 0.813: IC6.5 99.02,35.9 99.5,35.9 99.5,43.7 103.5,43.7 103.5,46.6 106.8,46.6 106.8,36.2 111.7,36.2 | 111.8,36.2 111.7,36.2 | 111.7,36.2 v111.9,35.4 118.8,35.5 118.7,20.8 101.45,20.8 R17.2 101.55,15.96 C11.2 | v111.9,31.4 114.84,31.4 SV2.3

## Text on the board
Bottom: TOOLKIT DE DIAGNOSTICO MEDICO | LABSOL @ COZCYT 2016 | SOLAM TECHNOLOGIES